# EAGLE board Circuit 6 using 7555 Timer (EAGLE 5.06)
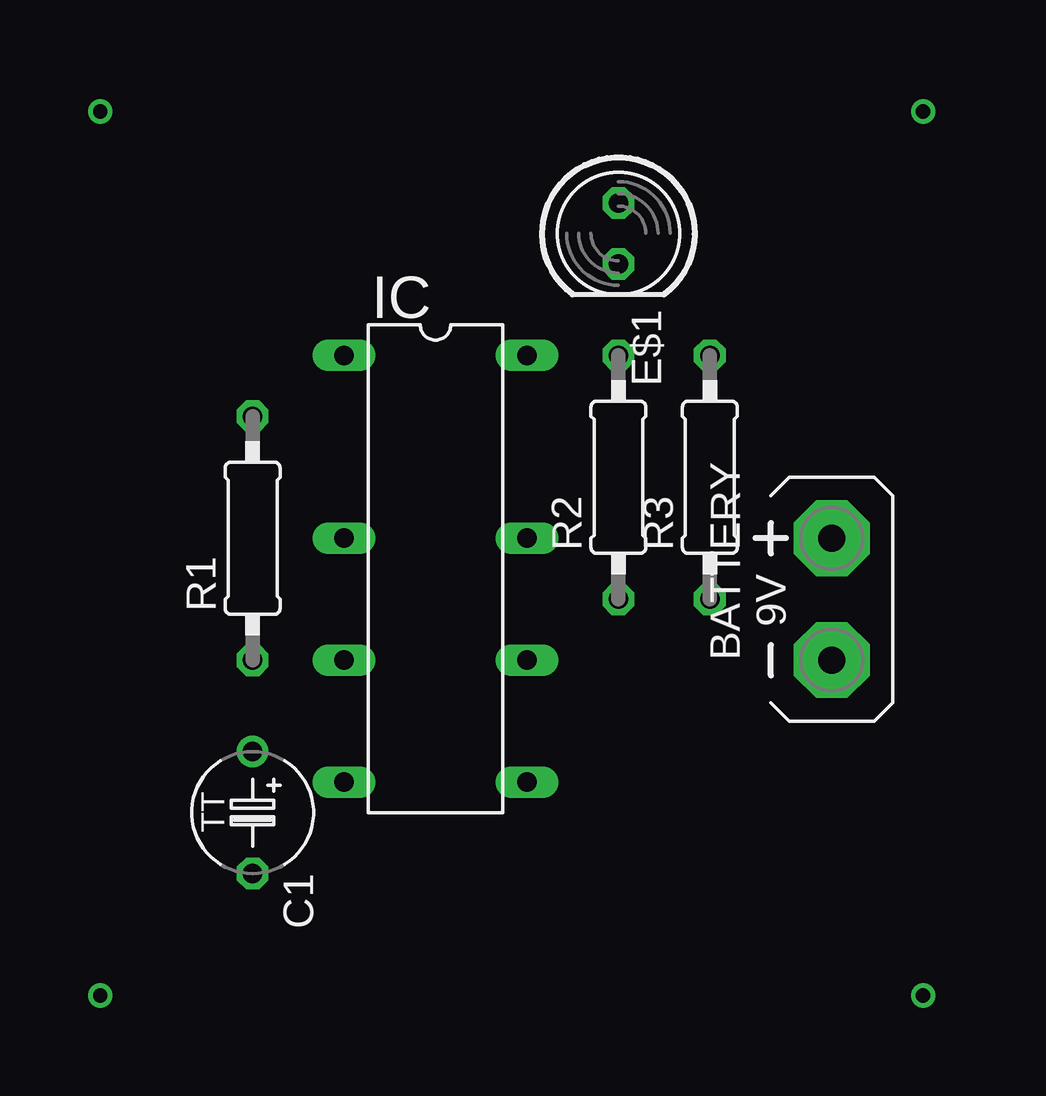
[diagram p0: board, top side]
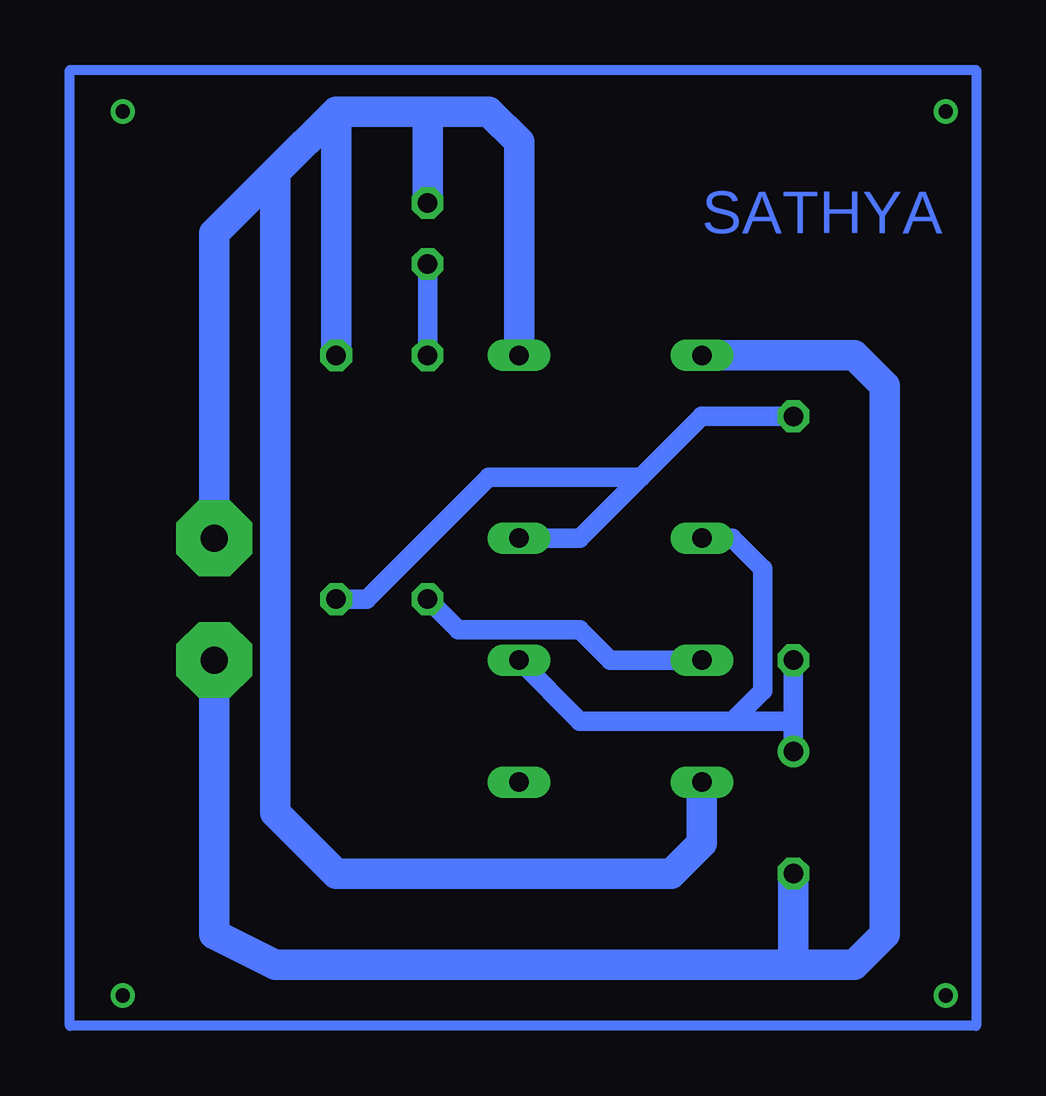
[diagram p1: board, bottom side, seen from below]

No outline drawn. Coordinates in mm, seen from the top.
Copper layers (1*16): Top 0.035mm / dielectric 1.5mm / Bottom 0.035mm
Design rules "default": minimum track width 10mil, minimum drill 24mil, track to track 8mil, track to pad 8mil, pad to pad 8mil, via to via 8mil, smd to smd 8mil, copper to edge 40mil, drill to drill 8mil, minimum pad ring 10mil, minimum via ring 8mil, stop-mask expansion 4mil, vias tented up to drill 0mil, thermal gap 10mil

## Footprints (pad centres in the part's own frame; a part is rotated, then mirrored left to right if it is on the bottom)
AB9V = drill 1.118 pad 3.15 octagon: + 0,2.54; - 0,-2.54
TAP5-50 = drill 0.813 round: + -2.54,0 | drill 0.813 octagon: - 2.54,0
LED5MM = drill 0.813 octagon: A -1.27,0; K 1.27,0
DIL16/8B = drill 0.813 long: 1 -8.89,-3.81; 4 -1.27,-3.81; 6 3.81,-3.81; 8 8.89,-3.81; 9 8.89,3.81; 11 3.81,3.81; 13 -1.27,3.81; 16 -8.89,3.81
0207/10 = drill 0.813 octagon: 1 -5.08,0; 2 5.08,0

## Placement (x,y rotation side)
BATTERY  4.5V  [AB9V]  64.77,25.4 0 top
C1  10uF  [TAP5-50]  40.64,16.51 270 top
E$1  [LED5MM]  55.88,40.64 270 top
IC  7555  [DIL16/8B]  48.26,26.67 270 top
R1  10K  [0207/10]  40.64,27.94 90 top
R2  1K  [0207/10]  55.88,30.48 90 top
R3  680K  [0207/10]  59.69,30.48 90 top

## Library data of the parts
BATTERY = battery
C1 = rcl
E$1 = led
IC = ic-package
R1-R3 = resistor

## Nets
S$2: IC.13 R1.2 R3.1
S$4: BATTERY.+ E$1.A IC.8 IC.16 R3.2
S$7: C1.+ IC.4 IC.11 R1.1
S$8: E$1.K R2.2
S$10: BATTERY.- C1.- IC.1
S$12: IC.6 R2.1

## Tracks (layer width: path | path; a pad name or v marks a point on that pad's centre or on a via)
S$1
  Bottom 0.406: 33.02,7.62 70.79,7.62 70.79,47.46 33.02,47.46 33.02,7.62
S$2
  Bottom 0.813: R3.1 58.42,25.4 53.34,30.48 46.99,30.48 | R1.2 44.45,33.02 46.99,30.48 | 46.99,30.48 49.53,27.94 IC.13
S$3  (via drill 0.6)
  other vias: 34.29,45.72
S$4
  Bottom 1.27: 55.88,45.72 E$1.A | BATTERY.+ 64.77,40.64 62.23,43.18 | 59.69,45.72 55.88,45.72 | 59.69,45.72 R3.2 | 62.23,43.18 59.69,45.72 | 62.23,43.18 62.23,16.51 59.69,13.97 45.72,13.97 44.45,15.24 IC.8 | 55.88,45.72 53.34,45.72 52.07,44.45 IC.16
S$5  (via drill 0.6)
  other vias: 68.58,45.72
S$6  (via drill 0.6)
  other vias: 34.29,8.89
S$7
  Bottom 0.813: IC.4 43.18,27.94 41.91,26.67 41.91,21.59 43.18,20.32 | IC.11 49.53,20.32 43.18,20.32 | 40.64,20.32 R1.1 | 40.64,20.32 43.18,20.32 | C1.+ 40.64,20.32
S$8
  Bottom 0.813: R2.2 E$1.K
S$10
  Bottom 1.27: BATTERY.- 64.77,11.43 62.23,10.16 40.64,10.16 | 40.64,10.16 38.1,10.16 36.83,11.43 36.83,34.29 38.1,35.56 IC.1 | 40.64,10.16 C1.-
S$11  (via drill 0.6)
  other vias: 68.58,8.89
S$12
  Bottom 0.813: R2.1 54.61,24.13 49.53,24.13 48.26,22.86 IC.6

## Text on the board
Bottom: SATHYA